# EAGLE board panels (EAGLE 9.5.1)
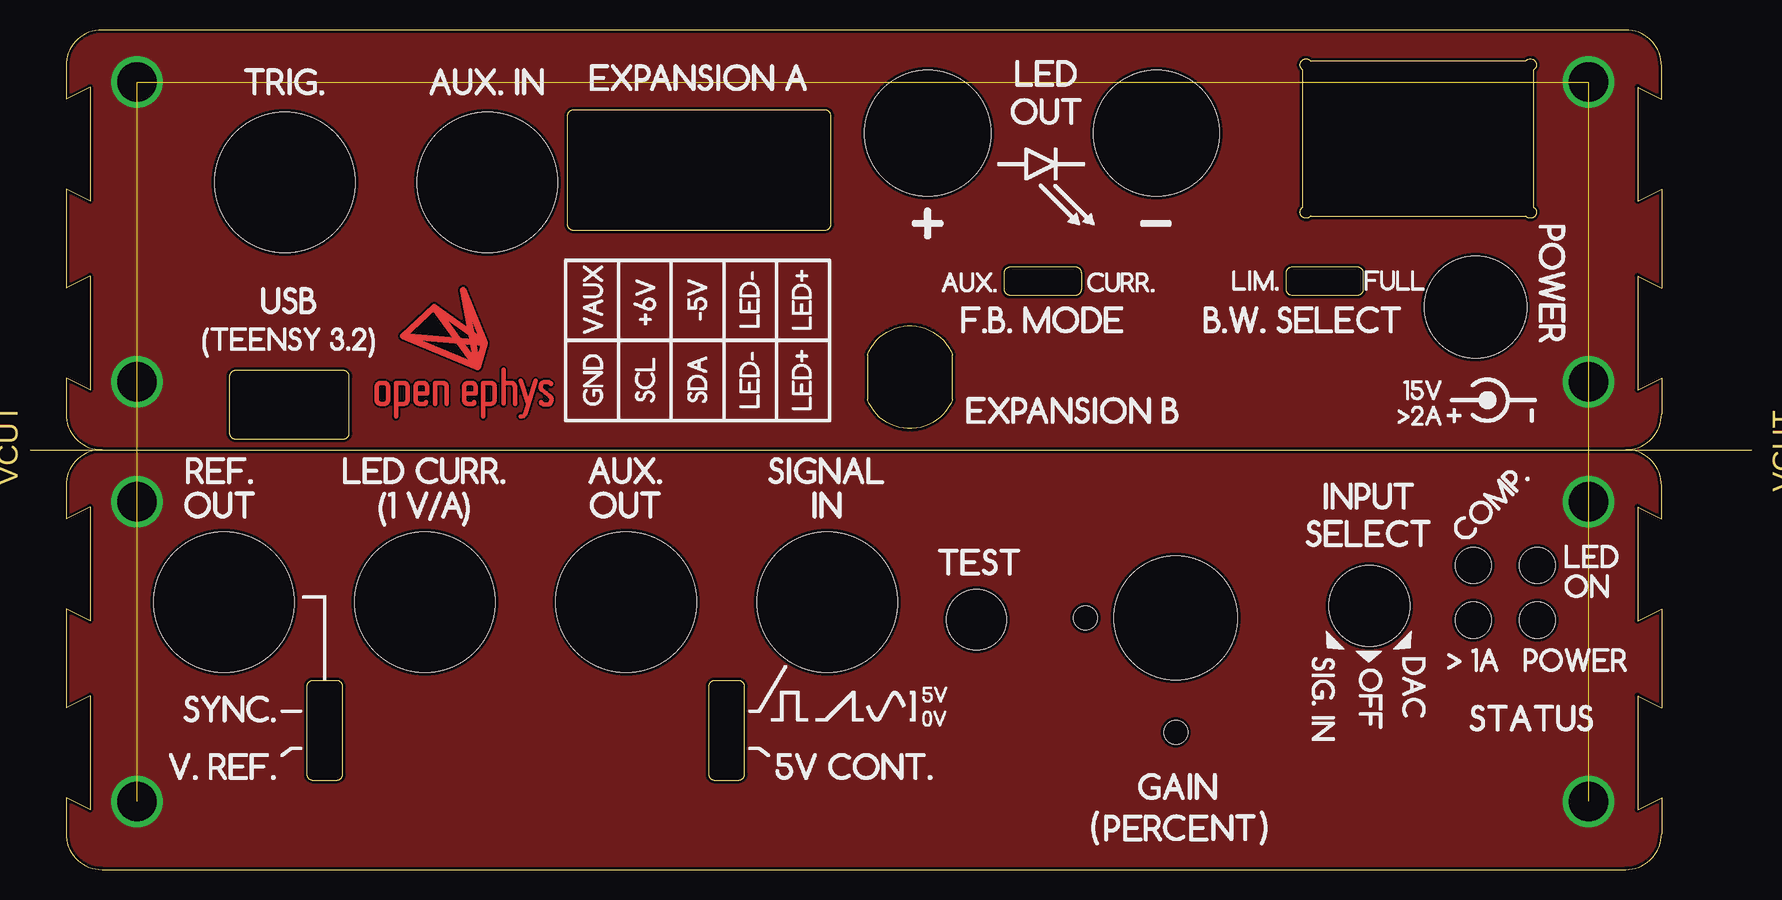
[diagram p0: board, top side]
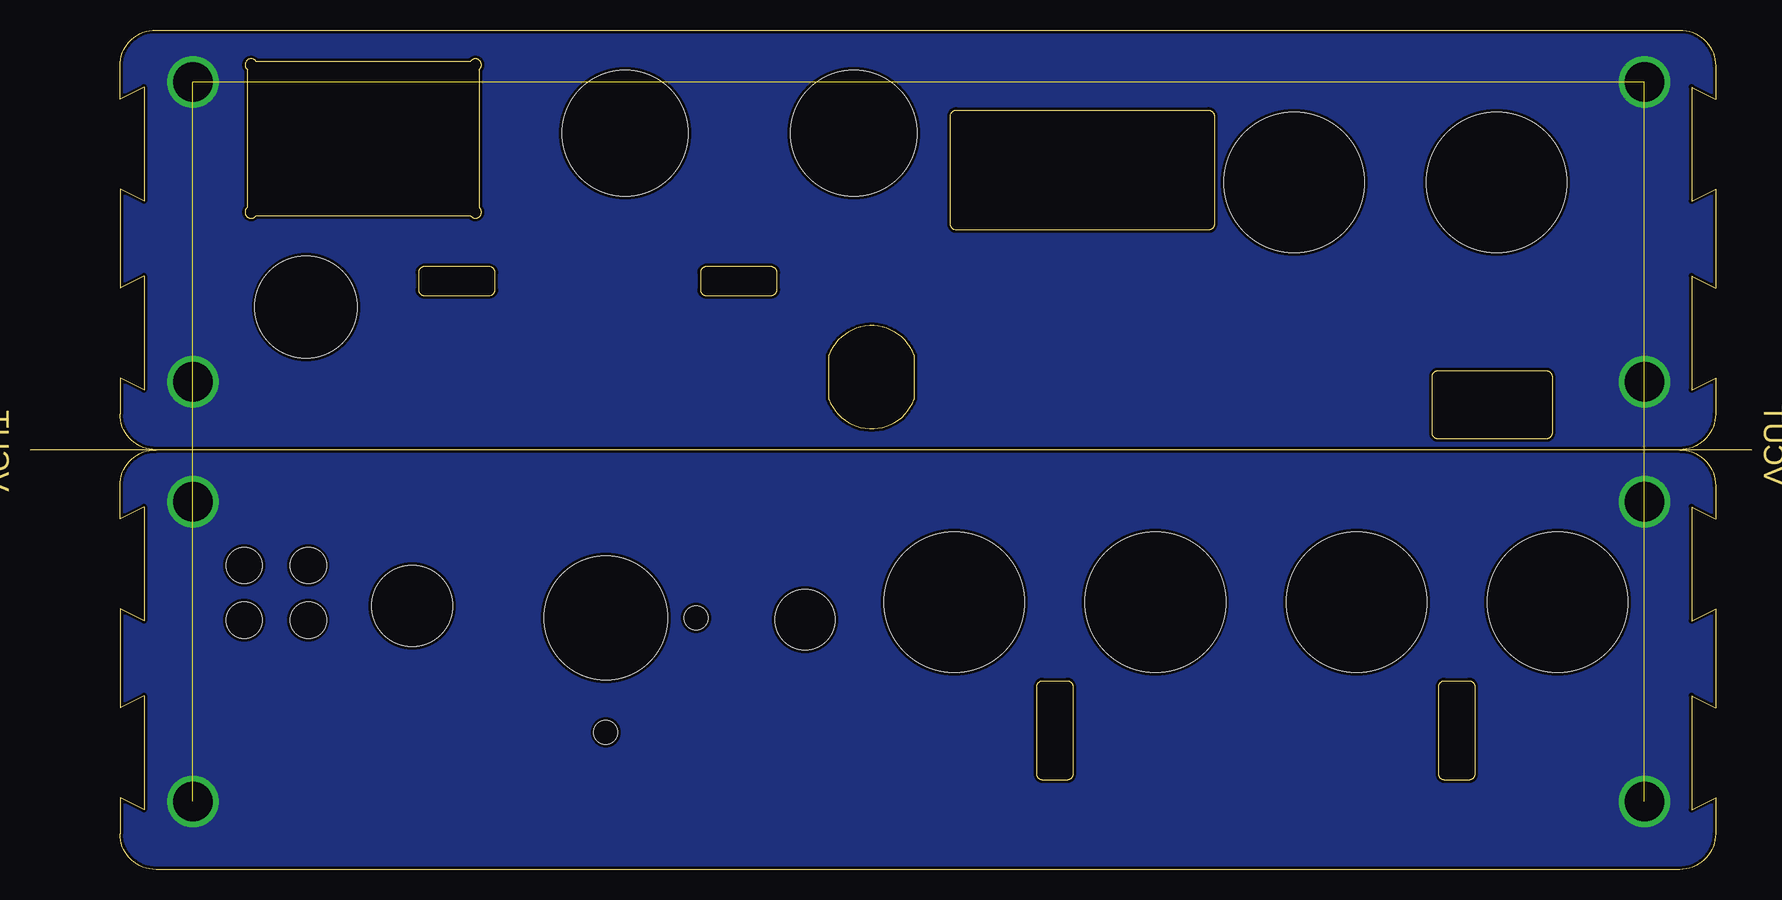
[diagram p1: board, bottom side, seen from below]

Size 143.5 x 70 mm. Coordinates in mm from the lower left corner, seen from the top.
Outline: 133,35 arc-90 136,32 136,29.25 134,30.25 134,20.75 136,21.75 136,13.5 134,14.5 134,5 136,6 136,3 arc-90 133,0 6,0 arc-90 3,3 3,6 5,5 5,14.5 3,13.5 3,21.75 5,20.75 5,30.25 3,29.25 3,32 arc-90 6,35
Outline: 6,35 arc-90 3,38 3,41 5,40 5,49.5 3,48.5 3,56.75 5,55.75 5,65.25 3,64.25 3,67 arc-90 6,70 133,70 arc-90 136,67 136,64.25 134,65.25 134,55.75 136,56.75 136,48.5 134,49.5 134,40 136,41 136,38 arc-90 133,35
Outline: 6,35 133,35
Outline: 0,35 143.5,35
Outline: 23.07,15.25 23.07,7.95 arc90 23.57,7.45 25.57,7.45 arc90 26.07,7.95 26.07,15.25 arc90 25.57,15.75 23.57,15.75 arc90 23.07,15.25
Outline: 56.57,15.25 56.57,7.95 arc90 57.07,7.45 59.07,7.45 arc90 59.57,7.95 59.57,15.25 arc90 59.07,15.75 57.07,15.75 arc90 56.57,15.25
Outline: 66.78,53.82 66.78,62.82 arc90 66.28,63.32 45.28,63.32 arc90 44.78,62.82 44.78,53.82 arc90 45.28,53.32 66.28,53.32 arc90 66.78,53.82
Outline: 106.77,54.5 124.67,54.5 arc196 125.37,55.2 125.37,66.7 arc196 124.67,67.4 106.77,67.4 arc196 106.07,66.7 106.07,55.2 arc196 106.77,54.5
Outline: 26.62,36.4 26.62,41.1 arc90 26.12,41.6 17.12,41.6 arc90 16.62,41.1 16.62,36.4 arc90 17.12,35.9 26.12,35.9 arc90 26.62,36.4
Outline: 105.22,50.26 110.62,50.26 arc-90 111.12,49.76 111.12,48.36 arc-90 110.62,47.86 105.22,47.86 arc-90 104.72,48.36 104.72,49.76 arc-90 105.22,50.26
Outline: 81.72,50.26 87.12,50.26 arc-90 87.62,49.76 87.62,48.36 arc-90 87.12,47.86 81.72,47.86 arc-90 81.22,48.36 81.22,49.76 arc-90 81.72,50.26
Outline: 69.8,42.9 arc-138 76.9,42.9 76.9,39.2 arc-138 69.8,39.2 69.8,42.9
Copper layers (1*16): Top 0.035mm / dielectric 1.5mm / Bottom 0.035mm
Design rules "seeed-studio-2-layer": minimum track width 6mil, minimum drill 12mil, track to track 6mil, track to pad 6mil, pad to pad 6mil, via to via 6mil, smd to smd 0mil, copper to edge 10mil, drill to drill 10mil, minimum pad ring 10mil, minimum via ring 6mil, stop-mask expansion 2mil, vias tented up to drill 100mil, thermal gap 10mil
Holes 11.7 mm at 16.16,22.28 49.69,22.28 66.45,22.28 32.92,22.28 21.24,57.28 38.13,57.28
Holes 5 mm at 78.9,20.83
Holes 6.75 mm at 111.65,21.98
Holes 3 mm at 120.3,25.36 120.3,20.79 125.63,20.79 125.63,25.36
Holes 10.5 mm at 74.83,61.4 93.88,61.4
Holes 8.5 mm at 120.49,46.9
Holes 10.3 mm at 95.5,20.98
Holes 1.98 mm at 95.5,11.45
Holes 2 mm at 87.98,20.98

## Placement (x,y rotation side)
E$1  [OE-LOGO-14X10]  35.5,41.5 0 top

## Library data of the parts
E$1 = jonnew

## Tracks (layer width: path | path; a pad name or v marks a point on that pad's centre or on a via)
GND  (via drill 3.3 pad 4.32)  (7 unrouted)
  other vias: 8.92,65.66 8.92,40.67 129.92,40.67 129.92,65.66 8.92,30.66 8.92,5.67 129.92,5.67 129.92,30.66
  pour Bottom: 0.8,-3 0.8,72.8 140.8,72.8 140.8,-3
  pour Top: 0.8,-2.5 0.8,73.3 140.8,73.3 140.8,-2.5

## Text on the board
Dimension: VCUT | VCUT